# Altium PCB tramhanV2.PcbDoc
Units mm, origin at the board's own origin, x right, y up, seen from the top; angles counter-clockwise.
Board outline 75.56 x 35.05 mm, 2 copper layers (Top Layer, Bottom Layer); 76 components, 49 nets, 260 pads, 287 vias.
Unrouted connection lines stored in the file: 1.
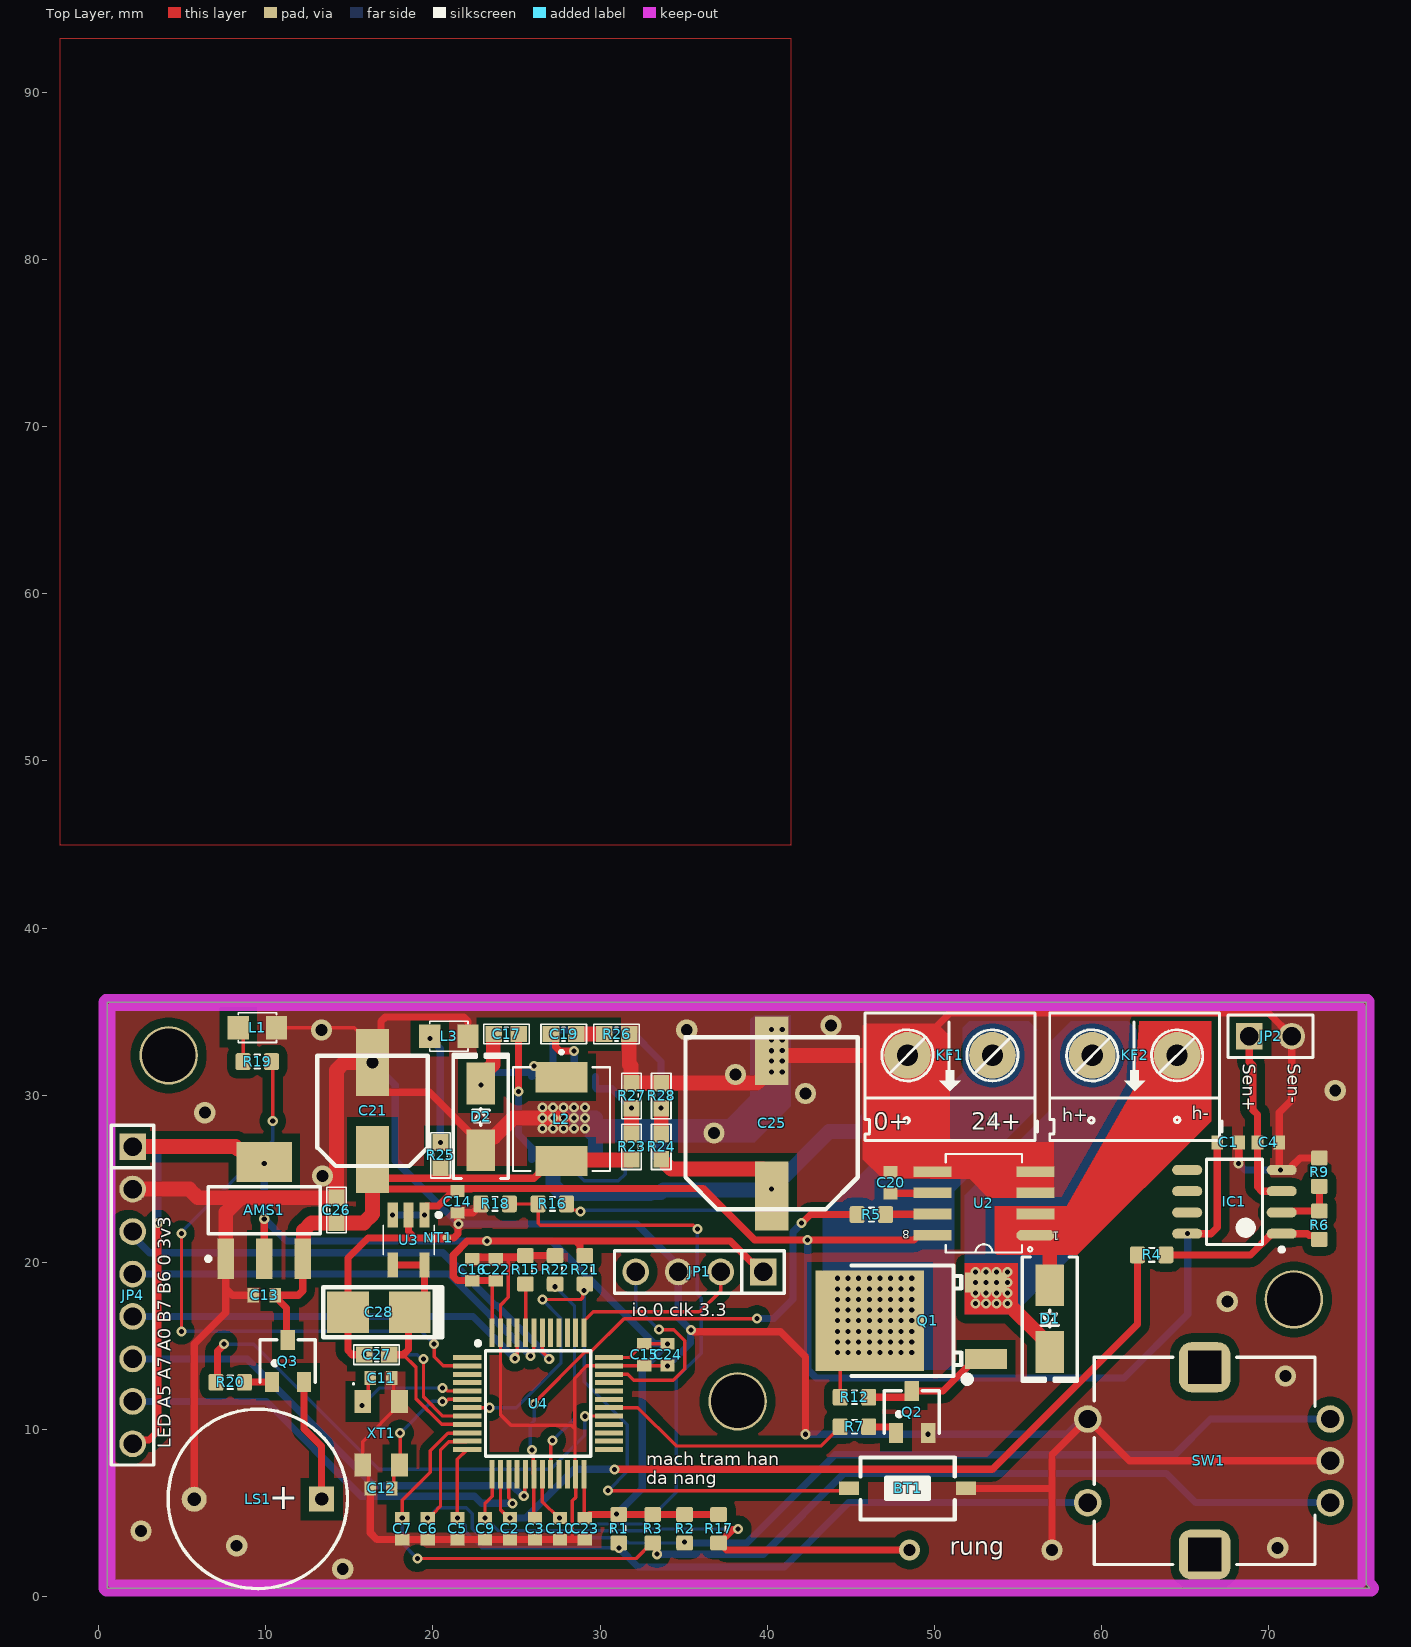
[diagram p0: Top Layer view]
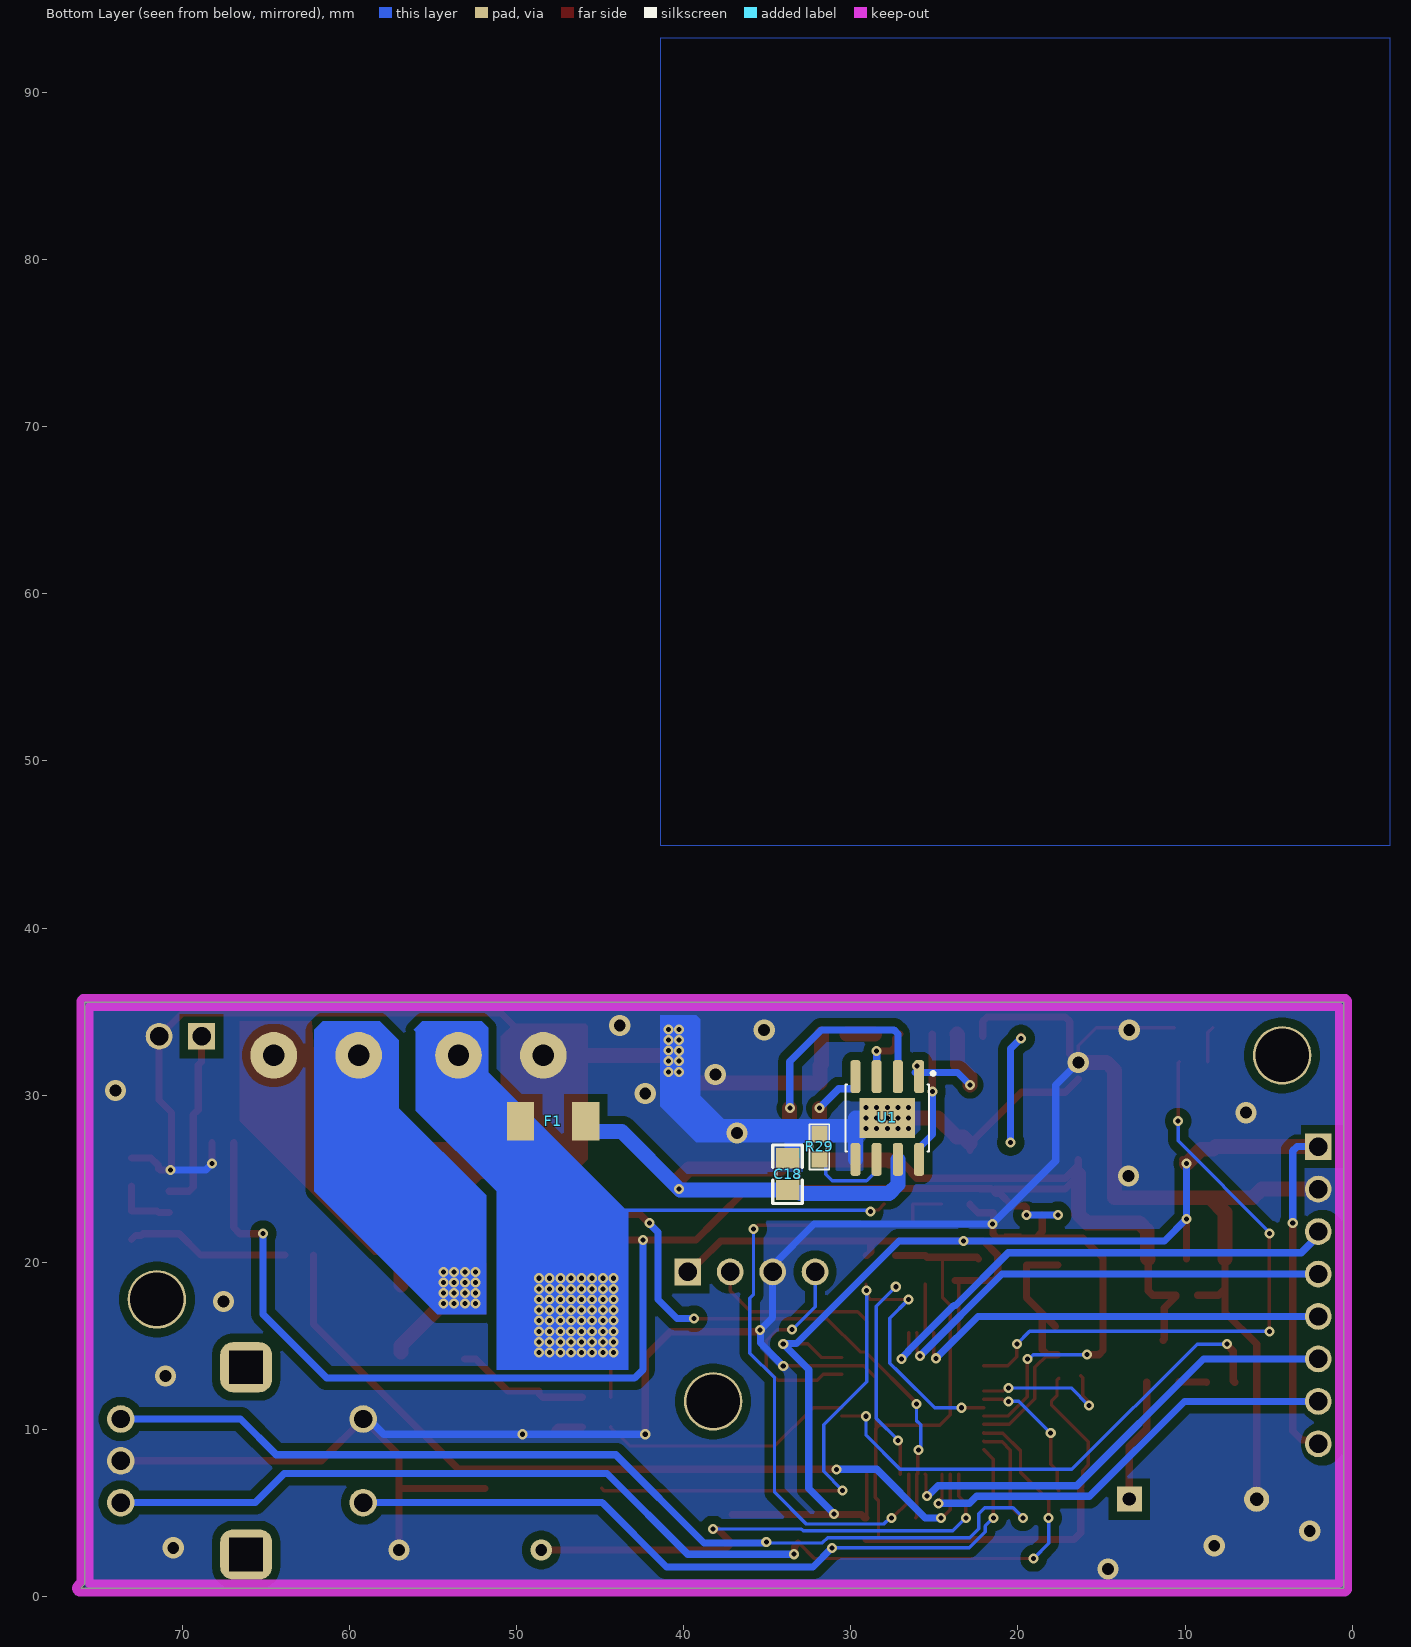
[diagram p1: Bottom Layer view, seen from below]
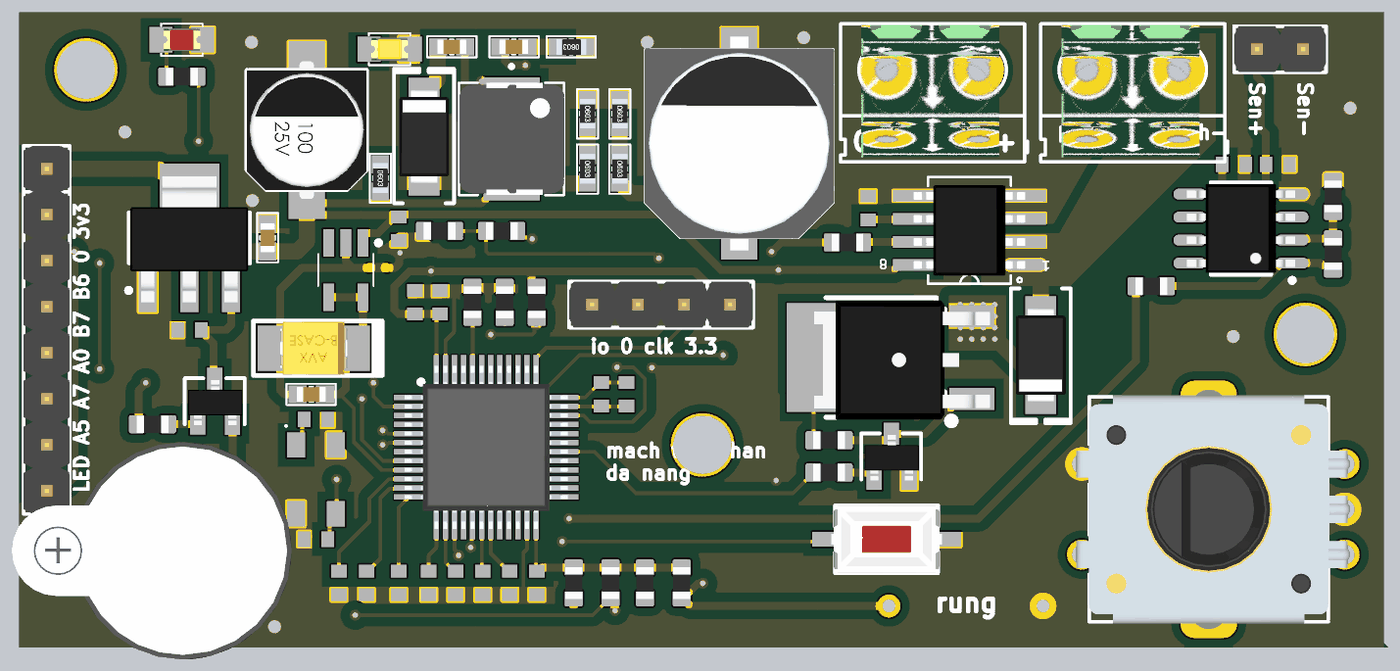
[diagram p2: 3D render of the assembled board from above, using the file's embedded part models]
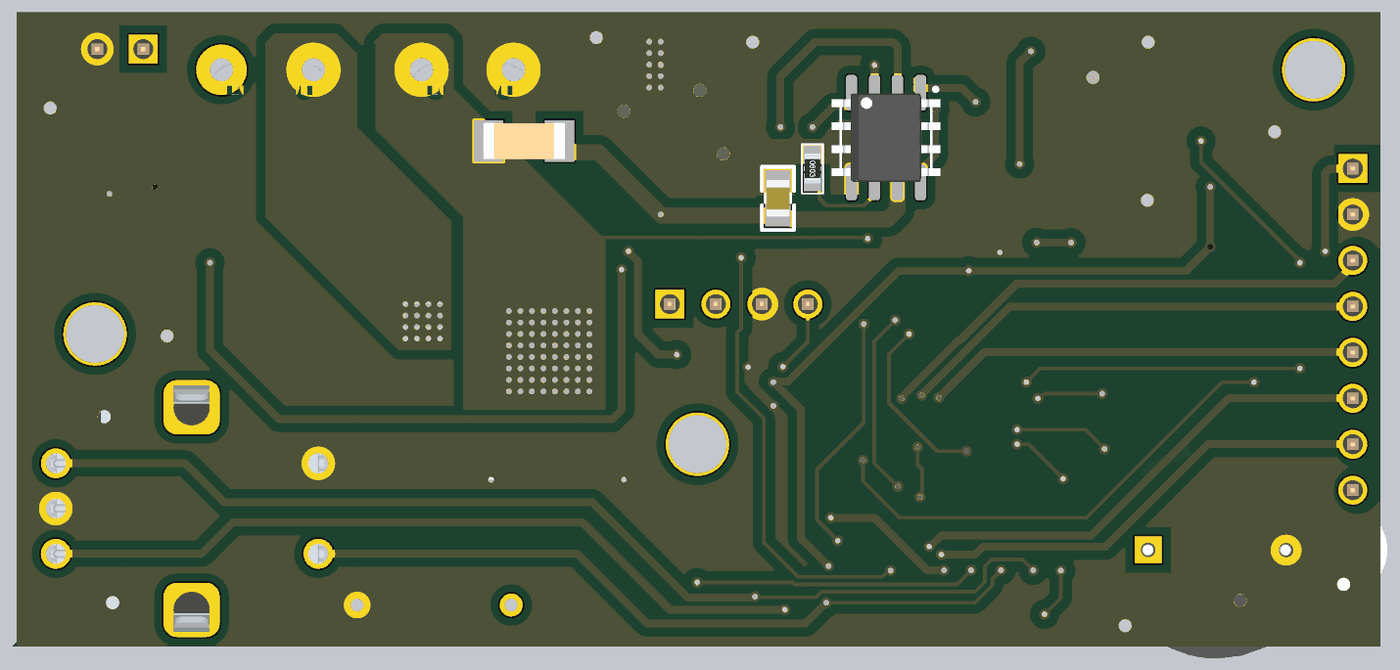
[diagram p3: 3D render of the assembled board from below, using the file's embedded part models]

## Layer stack, top to bottom
Top Solder: solder mask 0.0102, Solder Resist, Dk 3.5
Top Layer: signal copper 0.0356
Dielectric 1: dielectric 0.32, FR-4, Dk 4.8
Bottom Layer: signal copper 0.0356
Bottom Solder: solder mask 0.0102, Solder Resist, Dk 3.5

## Board outline
0.508,35.56 0.508,0.508 76.073,0.508 75.819,0.762 75.819,35.56

## Design rules (kind name [scope] priority, off if disabled: settings)
Clearance [All] p1: gap=0.508 ignorepadtopadclearanceinfootprint=FALSE
PlaneConnect [All] p1: planeconnectstyle=Direct reliefexpansion=0.508 reliefentries=4 reliefconductorwidth=0.254 reliefairgap=0.254
PolygonConnect [All] p1: connectstyle=Direct reliefconductorwidth=0.254 reliefentries=4 polygonreliefangle="90 Angle" airgapwidth=0.254
RoomDefinition Sheet1 [InComponentClass('Sheet1')] p1: confinementstyle=ConfineIn formatcopy=TRUE lockcomponents=FALSE outline 77.216,1.905 94.234,1.905 94.234,18.161 77.216,18.161
RoomDefinition Power [InComponentClass('Power')] p2: confinementstyle=ConfineIn formatcopy=TRUE lockcomponents=FALSE outline -74.803,-6.731 -24.003,-6.731 -24.003,18.669 -74.803,18.669
RoutingVias [All] p1: holewidth=0.5 width=0.8 viastyle="Through Hole" minholewidth=0.3 minwidth=0.6 maxholewidth=0.4 maxwidth=0.7
SolderMaskExpansion [All] p1: expansion=0.102 istentingtop=FALSE
Width [All] p1: maxlimit=0.889 minlimit=0.203 preferedwidth=0.432
29 further rules are at their usual default settings.

## Classes and differential pairs
component class Sheet1: AMS1 BT1 C1 C2 C3 C4 C5 C6 C7 C9 C10 C11 C12 C13 C14 C15 C16 C20 C22 C23 C24 D1 IC1 JP1 JP2 JP4 KF2 L1 LS1 Q1 Q2 Q3 R1 R2 R3 R4 R5 R6 R7 R9 R12 R15 R16 R17 R18 R19 R20 R21 R22 SW1 U2 U4 XT1
component class Power: C17 C18 C19 C21 C25 C26 C27 C28 D2 F1 KF1 L2 L3 NT1 R23 R24 R25 R26 R27 R28 R29 U1 U3

## Components (designator, comment, footprint, x,y, rotation, side; value= is the part's Value field where it differs from the comment)
AMS1 "AMS1117-3.3V" SOT223 9.906,23.114 r0 top value="AMS1117-3.3V SOT223"
BT1 "Nut Nhan 2 Chan SMD 3x6x2.5" "Nut Nhan 2 Chan SMD 3x6x2.5" 48.387,6.477 r180 top
C1 "104" CAPC1608X09L 67.564,27.178 r180 top
C2 "104" CAPC1608X09L 24.606,4.064 r270 top
C3 "103" CAPC1608X09L 26.098,4.064 r270 top
C4 "102" CAPC1608X09L 69.977,27.178 r180 top
C5 "0.1uF" CAPC1608X09L 21.463,4.064 r90 top
C6 "0.1uF" CAPC1608X09L 19.685,4.064 r90 top
C7 "0.1uF" CAPC1608X09L 18.161,4.064 r90 top
C9 "0.1uF" CAPC1608X09L 23.114,4.064 r270 top
C10 "2.2uF" CAPC1608X09L 27.591,4.064 r270 top
C11 "10pF" CAPC1608X09L 16.891,13.081 r180 top
C12 "10pF" CAPC1608X09L 16.891,6.477 r0 top
C13 "104" CAPC1608X09L 9.906,18.034 r0 top
C14 "104" CAPC1608X09L 21.463,23.622 r90 top
C15 "104" CAPC1608X09L 32.639,14.478 r90 top
C16 "104" CAPC1608X09L 22.352,19.558 r270 top
C17 "104" "tu 0603" 24.384,33.655 r0 top
C18 "474" "tu 0805" 33.782,25.273 r90 bottom
C19 "220pF" "tu 0603" 27.813,33.655 r0 top
C20 "1nF" CAPC1608X09L 47.371,24.765 r90 top
C21 "100uF" "tu nhom 6.3 (d)" 16.383,29.062 r90 top
C22 "104" CAPC1608X09L 23.749,19.558 r270 top
C23 "104" CAPC1608X09L 29.083,4.064 r90 top
C24 "104" CAPC1608X09L 34.036,14.478 r90 top
C25 "100uF" "tu nhom 10 (g)" 40.259,28.321 r90 top
C26 "106" "tu 0603" 14.224,23.114 r90 top
C27 "105" "tu 0603" 16.637,14.478 r180 top
C28 "100uF" "tu tantalum smd3528" 16.764,17.018 r180 top
D1 "SS34" "DIODE SMA" 56.896,16.637 r270 top
D2 "SS34" "DIODE SMA" 22.86,28.702 r90 top
F1 "0.5A 125V" "Cau Chi SMD1808" 47.803,28.448 r180 bottom
IC1 "LM358 SOP8" "SOP 8" 67.945,23.622 r180 top
JP1 "debug" "JP 1x4 DT" 39.751,19.431 r180 top
JP2 "JP 1x2 2.54" "JP 1x2 DT" 68.834,33.528 r0 top
JP4 "lcd_1.8 inch" "JP 1x8 DT" 2.032,26.924 r270 top
KF1 "VIN" "Con 2 KF301 5.08" 53.467,32.385 r180 top
KF2 "CON 2 KF301" "Con 2 KF301 5.08" 64.516,32.385 r180 top
L1 "LED 0805" LED-0805-Red 8.347,34.044 r0 top
L2 "100uH" "CUON CAM SMD 0530" 27.686,28.575 r270 top
L3 "LED 0805" LED-0805-Yellow 19.812,33.528 r0 top
LS1 "Coi Chip Speaker" "Coi Chip Speacker" 13.335,5.842 r180 top
NT1 "2mm" NetTie_20mil 20.32,21.463 r180 top net-tie
Q1 "TO-252" TO-252-3_L6.6-W6.1-P4.57-LS9.9-BR-CW 48.611,16.373 r0 top
Q2 "BC817" SOT-23 48.641,11.049 r0 top value=C9014
Q3 "BC817" SOT-23 11.303,14.097 r0 top value=C9014
R1 "10K" RESC1608X55N 31.115,4.064 r90 top
R2 "10K" RESC1608X55N 35.052,4.064 r90 top
R3 "10K" RESC1608X55N 33.147,4.064 r90 top
R4 "10K" RESC1608X55N 62.992,20.447 r180 top
R5 "1k" RESC1608X55N 46.228,22.86 r180 top
R6 "10K" RESC1608X55N 73.025,22.225 r270 top
R7 "4.7K" RESC1608X55N 45.212,10.16 r180 top
R9 "100R" RESC1608X55N 73.025,25.4 r270 top
R12 "10K" RESC1608X55N 45.212,11.938 r180 top
R15 "10K" RESC1608X55N 25.527,19.558 r90 top
R16 "18k" RESC1608X55N 27.143,23.495 r180 top
R17 "10k" RESC1608X55N 37.084,4.064 r270 top
R18 "1k" RESC1608X55N 23.714,23.495 r180 top
R19 "1k" RESC1608X55N 9.49,32.012 r180 top
R20 "470R" RESC1608X55N 7.874,12.827 r180 top
R21 "10K" RESC1608X55N 29.083,19.558 r90 top
R22 "10K" RESC1608X55N 27.305,19.558 r270 top
R23 "10k" "tro smd 0603" 31.877,26.924 r270 top
R24 "100k" "tro smd 0603" 33.655,26.924 r270 top
R25 "330R" "tro smd 0603" 20.447,26.416 r270 top
R26 "100k" "tro smd 0603" 30.988,33.655 r180 top
R27 "2k" "tro smd 0603" 31.877,29.972 r270 top
R28 "25k" "tro smd 0603" 33.655,29.972 r270 top
R29 "100k" "tro smd 0603" 31.877,26.924 r270 bottom
SW1 "482024764004" 482024764004 66.167,8.128 r0 top
U1 "MP1584EN" SOIC127P600X170-9N 27.813,28.637 r270 bottom
U2 "ACS712" SOIC8_50_328_25X90_SMT 52.959,23.527 r180 top
U3 "3.3V" SOT23-5 18.542,21.336 r270 top
U4 "STM32F103C8T6" LQFP-48_19.6_393_58X11_SMD 26.289,11.557 r0 top locked
XT1 "8 MHz" DFN220P320X110-4N 16.891,9.779 r270 top

## Footprints (in the part's own frame and the unit in brackets; to place one, negate y for a bottom-side part, rotate by r counter-clockwise, add the part's x,y. Pads: shape width x height; smd on the part's side, far side on the other; paste and mask are expansions set on the pad)
482024764004 [mm] "Mechanical Incremental Encoder Switch Plastic Shaft without bushing"
  round 1.65 hole 1.1: 1(-7,-2.5) 2(-7,2.5) A(7.5,-2.5) B(7.5,2.5) C(7.5,0)
  rrect50% 3.1x3 hole 2 square: S1(0,5.6) S2(0,-5.6)
  silkscreen extent -6.6,-6.2 6.6,6.2, body extent -7.32,-6.81 7.8,6.81, height 20.1
CAPC1608X09L [mm]
  rect 0.7x0.85 smd: 1(-0.65,0) 2(0.65,0)
  body extent -0.85,-0.45 0.85,0.45, height 0.9
"Cau Chi SMD1808" [mil]
  rect 64x90 smd: 1(-77,0) 2(77,0)
  body extent -91,-39 91,39, height 39
"Coi Chip Speacker" [mm]
  rect 1.5x1.5 hole 0.8: 1(0,0)
  round 1.5 hole 0.8: 2(7.62,0.013)
  silkscreen extent -1.55,-5.38 9.18,5.36, body extent -2.22,-6 13.24,6, height 4.5
"Con 2 KF301 5.08" [mil]
  round 110 hole 50: 1(0,0) 2(200,0)
  silkscreen extent -106,-100 300,200, body extent -45,-97 255,190, height 335
"CUON CAM SMD 0530" [mm] "CUON CAM SMD 0530"
  rect 1.8x3.1 smd: 1(-2.5,0) 2(2.5,0)
  silkscreen extent -4.1,-2.9 3.1,2.9, body extent -3.1,-2.88 3.1,2.92, height 3
DFN220P320X110-4N [mm]
  rect 1.4x1 smd: 1(-1.9,-1.1) 3(1.9,1.1) G(-1.9,1.1) G(1.9,-1.1)
  silkscreen extent -3,-1.7 -2.9,-1.6, body extent -2.55,-1.65 2.55,1.65, height 1.1
"DIODE SMA" [mm] "SMA"
  rect 2.5x1.7 smd: 1(-2,0) 2(2,0)
  silkscreen extent -3.68,-1.65 3.75,1.65, body extent -2.6,-1.37 2.6,1.37, height 2.4
"JP 1x2 DT" [mm] "2 pins, 1 row, straight, gold plating"
  rect 1.6x1.6 hole 1.1: 1(0,0)
  round 1.6 hole 1.1: 2(2.54,0)
  silkscreen extent -1.27,-1.27 3.81,1.27, body extent -1.27,-1.27 3.81,1.27, height 8.54
"JP 1x4 DT" [mm] "4 pins, 1 row, straight, gold plating"
  rect 1.6x1.6 hole 1.1: 1(0,0)
  round 1.6 hole 1.1: 2(2.54,0) 3(5.08,0) 4(7.62,0)
  silkscreen extent -1.27,-1.27 8.89,1.27, body extent -1.27,-1.27 8.89,1.27, height 8.54
"JP 1x8 DT" [mm] "8 pins, 1 row, straight, gold plating"
  rect 1.6x1.6 hole 1.1: 1(0,0)
  round 1.6 hole 1.1: 2(2.54,0) 3(5.08,0) 4(7.62,0) 5(10.16,0) 6(12.7,0) 7(15.24,0) 8(17.78,0)
  silkscreen extent -1.27,-1.27 19.05,1.27, body extent -1.27,-1.27 19.05,1.27, height 8.54
LED-0805-Red [mil]
  rect 50x55 smd: 1(0,0) 2(90,0)
  silkscreen extent 0,-35 90,35, body extent 5,-25 85,25, height 43
LED-0805-Yellow [mil]
  rect 50x55 smd: 1(0,0) 2(90,0)
  silkscreen extent 0,-35 90,35, body extent 5,-25 85,25, height 43
LQFP-48_19.6_393_58X11_SMD [mm] "48LQFP"
  rect 1.7x0.3 smd mask+0.076: 1(-4.238,2.75) 2(-4.238,2.25) 3(-4.238,1.75) 4(-4.238,1.25) 5(-4.238,0.75) 6(-4.238,0.25) 7(-4.238,-0.25) 8(-4.238,-0.75) 9(-4.238,-1.25) 10(-4.238,-1.75) 11(-4.238,-2.25) 12(-4.238,-2.75) 25(4.238,-2.75) 26(4.238,-2.25) 27(4.238,-1.75) 28(4.238,-1.25) 29(4.238,-0.75) 30(4.238,-0.25) 31(4.238,0.25) 32(4.238,0.75) 33(4.238,1.25) 34(4.238,1.75) 35(4.238,2.25) 36(4.238,2.75)
  rect 0.3x1.7 smd mask+0.076: 13(-2.75,-4.238) 14(-2.25,-4.238) 15(-1.75,-4.238) 16(-1.25,-4.238) 17(-0.75,-4.238) 18(-0.25,-4.238) 19(0.25,-4.238) 20(0.75,-4.238) 21(1.25,-4.238) 22(1.75,-4.238) 23(2.25,-4.238) 24(2.75,-4.238) 37(2.75,4.238) 38(2.25,4.238) 39(1.75,4.238) 40(1.25,4.238) 41(0.75,4.238) 42(0.25,4.238) 43(-0.25,4.238) 44(-0.75,4.238) 45(-1.25,4.238) 46(-1.75,4.238) 47(-2.25,4.238) 48(-2.75,4.238)
  silkscreen extent -3.72,-3.15 3.15,3.72, body extent -4.5,-4.5 4.5,4.5, height 1.7
NetTie_20mil [mil]
  round 20 smd paste-78.74 mask+4: 1(-19.68,0) 2(19.68,0)
  Top Layer region: -20,10 20,10 20,-10 -20,-10
"Nut Nhan 2 Chan SMD 3x6x2.5" [mm] "Switch SMD type"
  rect 1.2x0.8 smd: 1(-3.5,0) 2(3.5,0)
  silkscreen extent -2.82,-1.85 2.82,1.85, body extent -3.05,-1.85 3.05,1.85, height 2.5
RESC1608X55N [mm]
  round 0.254 on Mech15: 0(0,0)
  rrect25% 0.9x1 smd: 1(-0.85,0) 2(0.85,0)
  Top Layer pour cut-out: -0.6,0.5 -0.4,0.7 0.4,0.7 0.6,0.5 0.6,-0.5 0.4,-0.7 -0.4,-0.7 -0.6,-0.5
  silkscreen extent -0.15,-0.41 0.15,0.41, body extent -0.87,-0.47 0.88,0.48, height 0.54
SOIC8_50_328_25X90_SMT [mil] "SOIC"
  oval 90x25 smd mask+3: 1(-121.32,75)
  rect 90x25 smd mask+3: 2(-121.32,25) 3(-121.32,-25) 4(-121.32,-75) 5(121.32,-75) 6(121.32,-25) 7(121.32,25) 8(121.32,75)
  silkscreen extent -114,-116 90,116, body extent -121,-98 121,98, height 79
SOIC127P600X170-9N [mm]
  rrect54% 1.97x0.6 smd: 1(-2.475,1.905) 2(-2.475,0.635) 3(-2.475,-0.635) 4(-2.475,-1.905) 5(2.475,-1.905) 6(2.475,-0.635) 7(2.475,0.635) 8(2.475,1.905)
  rect 2.41x3.3 smd paste-3: 9(0,0)
  silkscreen extent -2.77,-2.5 2,2.84, body extent -2.45,-3 2.45,3, height 1.7
"SOP 8" [mm] "SOIC, 8-Leads, Body 4.9x3.9mm, Pitch 1.27mm, IPC High Density"
  oval 1.8x0.6 smd: 1(-2.825,1.905) 2(-2.825,0.635) 3(-2.825,-0.635) 4(-2.825,-1.905) 5(2.825,-1.905) 6(2.825,-0.635) 7(2.825,0.635) 8(2.825,1.905)
  silkscreen extent -2.95,-2.55 1.68,2.98, body extent -2.99,-2.45 3,2.45, height 1.6
SOT23-5 [mm]
  rect 1.5x0.6 smd: 1(-1.5,0.95) 2(-1.5,0) 3(-1.5,-0.95) 4(1.5,-0.95) 5(1.5,0.95)
  silkscreen extent -1.62,-1.53 0.88,1.93, body extent -1.75,-1.52 1.75,1.53, height 1.45
SOT223 [mm]
  rect 1x2.4 smd: 1(-2.3,-2.9) 2(0,-2.9) 3(2.3,-2.9)
  rect 3.3x2.4 smd: 4(0,2.9)
  silkscreen extent -3.47,-3.02 3.35,1.4, body extent -3.25,-3.56 3.25,3.4, height 1.68
SOT-23 [mm] "SOT 23 _ 1-3-2"
  rect 0.85x1.2 smd: 1(-0.94,-1.245) 2(0.985,-1.25) 3(0.005,1.25)
  silkscreen extent -1.65,-1.27 1.65,1.27, body extent -1.47,-1.33 1.53,1.17, height 1.06
TO-252-3_L6.6-W6.1-P4.57-LS9.9-BR-CW [mm]
  rect 2.5x1.2 smd: 1(4.475,-2.149) 3(4.475,2.423)
  rect 6.5x6 smd: 2(-2.475,0.137)
  silkscreen extent -3.57,-3.56 3.55,3.44, body extent -4.23,-3.29 5.47,3.29, height 2.32
"tro smd 0603" [mm] "Chip Capacitor, 2-Leads, Body 1,60x0,80mm, IPC Medium Density"
  rect 1x0.95 smd mask+0.076: 1(-0.75,0) 2(0.75,0)
  silkscreen extent -1.35,-0.58 1.37,0.58, body extent -0.82,-0.42 0.82,0.43, height 0.44
"tu 0603" [mm] "Chip Capacitor, 2-Leads, Body 1,60x0,80mm, IPC Medium Density"
  rect 1x0.95 smd mask+0.076: 1(-0.75,0) 2(0.75,0)
  silkscreen extent -1.35,-0.58 1.37,0.58, body extent -0.8,-0.4 0.8,0.4, height 0.9
"tu 0805" [mm] "Compoment SMD 80x50mil"
  rect 1.2x1.4 smd: 1(-0.946,-0.003) 2(0.954,-0.003)
  silkscreen extent -1.75,-0.89 1.75,0.89, body extent -1.01,-0.64 1.01,0.63, height 0.61
"tu nhom 6.3 (d)" [mm]
  rect 4x2 smd: 1(-2.9,0) 2(2.9,0)
  silkscreen extent -3.3,-3.3 3.3,3.3, body extent -3.8,-3.3 3.8,3.3, height 8
"tu nhom 10 (g)" [mm]
  rect 4.1x2 smd: 1(-4.35,0) 2(4.35,0)
  silkscreen extent -5.15,-5.15 5.15,5.15, body extent -5.9,-5.25 5.9,5.25, height 10.5
"tu tantalum smd3528" [mm]
  rect 2.5x2.5 smd: 1(-1.85,0) 2(1.85,0)
  silkscreen extent -3.78,-1.5 3.33,1.5, body extent -1.85,-1.46 1.85,1.47, height 2.03

## Part data
AMS1: library part "AMS1117 SMD", "Dán", Chung_Loai=Dán, Don_Vi=Con, Ma_Hang=MH000596
C1 C2 C3 C4 C10 C11 C12 C13 C14 C15 C16 C20 C22 C23 C24: library part GRM188R71H104KA93D, "CAP CER 0.1UF 50V X7R 0603", Capacitance=0.1uF, Manufacturer="Murata Electronics North America", Operating Temperature="-55°C ~ 125°C", Package / Case="0603 (1608 Metric)", Ratings=-, Supplier Part Number 1=490-1519-2-ND, Temperature Coefficient=X7R, Tolerance=±10%, Voltage - Rated=50V, Applications="General Purpose", Category=Capacitors, ComponentLink1Description=http://www.murata.com/~/media/webrenewal/support/library/catalog/products/capacitor/mlcc/c02e.ashx?la=en-us, ComponentLink1URL=http://www.murata.com/~/media/webrenewal/support/library/catalog/products/capacitor/mlcc/c02e.ashx?la=en-us, Features=-, Height - Seated (Max)=-, Lead Spacing=-, Lead Style=-, Manufacturer Part Number=GRM188R71H104KA93D, Mounting Type="Surface Mount, MLCC", Packaging="Tape & Reel (TR)", Part Status=Active, Pricing 1="4000=0.01822, 8000=0.01663, 12000=0.01584 (USD)", Pricing 2="1=0.12, 10=0.084, 100=0.0396, 500=0.02778, 1000=0.023 (USD)", RoHS="RoHS Compliant", Size / Dimension="0.063\" L x 0.032\" W (1.60mm x 0.80mm)", Stock=19812000, Supplier 1=Digi-Key, Supplier 2=Digi-Key, Supplier Part Number 2=490-1519-1-ND, Thickness (Max)="0.035\" (0.90mm)"
C5 C6 C7 C9: library part GRM188R71H104KA93D, "CAP CER 0.1UF 50V X7R 0603", Manufacturer="Murata Electronics North America", Operating Temperature="-55°C ~ 125°C", Package / Case="0603 (1608 Metric)", Ratings=-, Supplier Part Number 1=490-1519-2-ND, Temperature Coefficient=X7R, Tolerance=±10%, Voltage - Rated=50V, Applications="General Purpose", Capacitance=0.1uF, Category=Capacitors, ComponentLink1Description=http://www.murata.com/~/media/webrenewal/support/library/catalog/products/capacitor/mlcc/c02e.ashx?la=en-us, ComponentLink1URL=http://www.murata.com/~/media/webrenewal/support/library/catalog/products/capacitor/mlcc/c02e.ashx?la=en-us, Features=-, Height - Seated (Max)=-, Lead Spacing=-, Lead Style=-, Manufacturer Part Number=GRM188R71H104KA93D, Mounting Type="Surface Mount, MLCC", Packaging="Tape & Reel (TR)", Part Status=Active, Pricing 1="4000=0.01822, 8000=0.01663, 12000=0.01584 (USD)", Pricing 2="1=0.12, 10=0.084, 100=0.0396, 500=0.02778, 1000=0.023 (USD)", RoHS="RoHS Compliant", Size / Dimension="0.063\" L x 0.032\" W (1.60mm x 0.80mm)", Stock=19812000, Supplier 1=Digi-Key, Supplier 2=Digi-Key, Supplier Part Number 2=490-1519-1-ND, Thickness (Max)="0.035\" (0.90mm)"
C17: library part "Tu 0603 104 50V 10%", "Dán", Chung_Loai=Dán, Don_Vi=Con, Ma_Hang=MH004568, So_Chan=2, Ten_Linh_Kien="Tụ 0603 104-100nF 10% 50V"
C18: library part "Tu 0805 474 50V 10%", "Dán", Chung_Loai=Dán, Don_Vi=Con, Ma_Hang=MH006116, So_Chan=2, Ten_Linh_Kien="Tụ 0805 474-470nF 50V 10%"
C19: library part "Tu 0603 22pF 50V 10%", "Dán", Chung_Loai=Dán, Don_Vi=Con, Ma_Hang=MH004570, So_Chan=2, Ten_Linh_Kien="Tụ 0603 22pF 50V 10%"
C21: library part "Tu Nhom 100uF 16V", "Dán", Chung_Loai=Dán, Don_Vi=Con, Ma_Hang=MH002219, So_Chan=2, Ten_Linh_Kien="Tụ Nhôm 100uF 16V 6.3x5.4MM"
C25: library part "Tu Nhom 100uF 35V", "Dán", Chung_Loai=Dán, Don_Vi=Con, Ma_Hang=MH004019, So_Chan=2, Ten_Linh_Kien="Tụ Nhôm 100uF 35V"
C26 C27: library part "Tu 0603 106 16V 20%", "Dán", Chung_Loai=Dán, Don_Vi=Con, Ma_Hang=MH004848, So_Chan=2, Ten_Linh_Kien="Tụ 0603-10uF 20% 16V"
C28: library part "Tu tantalum 100uF 6.3V SMD3528", "Dán", Chung_Loai=Dán, Don_Vi=Con, Ma_Hang=MH007595, So_Chan=2, Ten_Linh_Kien="Tụ tantalum 107J-100uF 6.3V SMD3528"
D1 D2: library part "Diode SS34 ( 1N5822 )", "Dán", Chung_Loai=Dán, Don_Vi=Con, Ma_Hang=MH002104, Ten_Linh_Kien="Diode SS34 3A 40V SMA ( 1N5822 SS34A)"
F1: library part "Cau chi 0.5A 125V SMD1808", "Cau chi 0.5A 125V SMD1808", Ma_Hang=MH009241, Ten="Cầu Chì 0.5A 125V SMD1808 0451.500MRL"
IC1: "Dán", Chung_Loai=Dán, Don_Vi=Con, Ma_Hang=MH000609, Ten_Linh_Kien="LM358 SOP8"
JP1: library part "JP 1x4 2.54 Duc Thang", "Cắm", Chung_Loai=Cắm, Don_Vi=Con, Ma_Hang=MH000903, Ten_Linh_Kien="Jump Đơn Đực 2.54MM 1x40P Thẳng 11MM"
JP2: library part "JP 1x2 2.54 Duc Thang", "Cắm", Chung_Loai=Cắm, Don_Vi=Con, Ma_Hang=MH000903, Ten_Linh_Kien="Jump Đơn Đực 2.54MM 1x40P Thẳng 11MM"
JP4: library part "JP 1x8 2.54 Duc Thang", "Cắm", Chung_Loai=Cắm, Don_Vi=Con, Ma_Hang=MH000903, Ten_Linh_Kien="Jump Đơn Đực 2.54MM 1x40P Thẳng 11MM"
KF1: library part "CON 2 KF301", "Cắm", Chung_Loai=Cắm, Don_Vi=Con, Ma_Hang=MH000987, Ten_Linh_Kien="CON 2 KF301-2P 5.08MM Xanh Dương"
KF2: "Cắm", Chung_Loai=Cắm, Don_Vi=Con, Ma_Hang=MH000987, Ten_Linh_Kien="CON 2 KF301-2P 5.08MM Xanh Dương"
L1: library part "LED 0805 Do", "Dán", Chung_Loai=Dán, Don_Vi=Con, Ma_Hang=MH000897, Ten_Linh_Kien="LED 0805 Màu Đỏ (Red)"
L2: library part "Cuon Cam SMD 0530", "SMD 0530", Package=None, Availability=Unavailable, MP=FDV0530-H-1R5M=P3, Price=None
L3: library part "LED 0805 Vang", "Dán", Chung_Loai=Dán, Don_Vi=Con, Ma_Hang=MH002329, Ten_Linh_Kien="LED 0805 Màu Vàng ( Yellow)"
LS1: "Còi chip"
NT1: library part NetTie_2mm
Q1: library part "FET AO D409", "P-Channel Power MOSFET", ComponentLink1Description="Manufacturer Link", ComponentLink1URL=http://www.irf.com/, ComponentLink2Description=Datasheet, ComponentLink2URL=http://www.irf.com/product-info/datasheets/data/irf9540.pdf, DatasheetVersion=PD-9.421C, LatestRevisionDate=17-Jul-2002, LatestRevisionNote="Re-released for DXP Platform.", Note="Pin 2 is electrically connected to pin 4.", PackageDescription="TO, Thru-Hole, Vertical, Heatsink Mounted; 3 In-Line Leads; Pitch 2.54 mm", PackageReference=TO-220AB, PackageVersion=Feb-1997, Published=8-Jun-2000, Publisher="Altium Limited"
Q2 Q3: library part "Trans BC817", "SOT-23 - C8658"
R1 R2 R3 R4 R6 R9 R15 R19 R20 R21 R22: library part RC0603FR-0710KL, "RES SMD 10K OHM 1% 1/10W 0603", Manufacturer=Yageo, Operating Temperature="-55°C ~ 155°C", Package / Case="0603 (1608 Metric)", Power (Watts)="0.1W, 1/10W", Resistance (Ohms)=10k, Supplier Device Package=0603, Supplier Part Number 1=311-10.0KHRCT-ND, Temperature Coefficient=±100ppm/°C, Tolerance=±1%, Category=Resistors, ComponentLink1Description=http://www.yageo.com/documents/recent/PYu-RC_Group_51_RoHS_L_04.pdf, ComponentLink1URL=http://www.yageo.com/documents/recent/PYu-RC_Group_51_RoHS_L_04.pdf, Composition="Thick Film", Features="Moisture Resistant", Height="0.022\" (0.55mm)", Manufacturer Part Number=RC0603FR-0710KL, Number of Terminations=2, Packaging="Cut Tape (CT)", Pricing 1="1=0.1, 10=0.014, 25=0.01, 100=0.0057, 250=0.00436, 500=0.00348, 1000=0.00257, 2500=0.00223 (USD)", RoHS="RoHS Compliant", Size / Dimension="0.063\" L x 0.031\" W (1.60mm x 0.80mm)", Stock 1=13504930, Supplier 1=Digi-Key
R5 R16 R17 R18: library part RC0603FR-072R2L, "RES SMD 2.2 OHM 1% 1/10W 0603", Manufacturer=Yageo, Operating Temperature="-55°C ~ 155°C", Package / Case="0603 (1608 Metric)", Power (Watts)="0.1W, 1/10W", Resistance (Ohms)=2.2, Supplier Device Package=0603, Supplier Part Number 1=311-2.2HRCT-ND, Temperature Coefficient=±200ppm/°C, Tolerance=±1%, Category=Resistors, ComponentLink1Description=http://www.yageo.com/documents/recent/PYu-RC_Group_51_RoHS_L_04.pdf, ComponentLink1URL=http://www.yageo.com/documents/recent/PYu-RC_Group_51_RoHS_L_04.pdf, Composition="Thick Film", Features="Moisture Resistant", Height="0.022\" (0.55mm)", Manufacturer Part Number=RC0603FR-072R2L, Number of Terminations=2, Packaging="Cut Tape (CT)", Pricing 1="1=0.1, 10=0.02, 25=0.0144, 100=0.0082, 250=0.00624, 500=0.00498, 1000=0.00367, 2500=0.00319 (USD)", RoHS="RoHS Compliant", Size / Dimension="0.063\" L x 0.031\" W (1.60mm x 0.80mm)", Stock 1=16531, Supplier 1=Digi-Key
R7: library part RC0603FR-0747KL, "RES SMD 47K OHM 1% 1/10W 0603", Manufacturer=Yageo, Operating Temperature="-55°C ~ 155°C", Package / Case="0603 (1608 Metric)", Power (Watts)="0.1W, 1/10W", Resistance (Ohms)=47k, Supplier Device Package=0603, Supplier Part Number 1=311-47.0KHRCT-ND, Temperature Coefficient=±100ppm/°C, Tolerance=±1%, Category=Resistors, ComponentLink1Description=http://www.yageo.com/documents/recent/PYu-RC_Group_51_RoHS_L_04.pdf, ComponentLink1URL=http://www.yageo.com/documents/recent/PYu-RC_Group_51_RoHS_L_04.pdf, Composition="Thick Film", Features="Moisture Resistant", Height="0.022\" (0.55mm)", Manufacturer Part Number=RC0603FR-0747KL, Number of Terminations=2, Packaging="Cut Tape (CT)", Pricing 1="1=0.1, 10=0.014, 25=0.01, 100=0.0057, 250=0.00436, 500=0.00348, 1000=0.00257, 2500=0.00223 (USD)", RoHS="RoHS Compliant", Size / Dimension="0.063\" L x 0.031\" W (1.60mm x 0.80mm)", Stock 1=930868, Supplier 1=Digi-Key
R12: library part RC0603FR-0722RL, "RES SMD 22 OHM 1% 1/10W 0603", Manufacturer=Yageo, Operating Temperature="-55°C ~ 155°C", Package / Case="0603 (1608 Metric)", Power (Watts)="0.1W, 1/10W", Resistance (Ohms)=22, Supplier Device Package=0603, Supplier Part Number 1=311-22.0HRCT-ND, Temperature Coefficient=±100ppm/°C, Tolerance=±1%, Category=Resistors, ComponentLink1Description=http://www.yageo.com/documents/recent/PYu-RC_Group_51_RoHS_L_04.pdf, ComponentLink1URL=http://www.yageo.com/documents/recent/PYu-RC_Group_51_RoHS_L_04.pdf, Composition="Thick Film", Features="Moisture Resistant", Height="0.022\" (0.55mm)", Manufacturer Part Number=RC0603FR-0722RL, Number of Terminations=2, Packaging="Cut Tape (CT)", Pricing 1="1=0.1, 10=0.014, 25=0.01, 100=0.0057, 250=0.00436, 500=0.00348, 1000=0.00257, 2500=0.00223 (USD)", RoHS="RoHS Compliant", Size / Dimension="0.063\" L x 0.031\" W (1.60mm x 0.80mm)", Stock 1=575303, Supplier 1=Digi-Key
R23 R27: library part "Tro 0603 5% 510R", "Dán", Chung_Loai=Dán, Don_Vi=Con, Ma_Hang=MH007667, So_Chan=2, Ten_Linh_Kien="Trở 0603 5% 510R"
R24 R26 R28 R29: library part "Tro 0603 5% 100k", "Dán", Chung_Loai=Dán, Don_Vi=Con, Ma_Hang=MH006314, So_Chan=2, Ten_Linh_Kien="Trở 0603 5% 100k"
R25: library part "Tro 0603 5% 330R", "Dán", Chung_Loai=Dán, Don_Vi=Con, Ma_Hang=MH006910, So_Chan=2, Ten_Linh_Kien="Trở 0603 5% 330R"
SW1: "WS-ENTV Mechanical Incremental Encoder Switch, Plastic Shaft without bushing, 24Pulse/360°, 24positi", Insulation Resistance=100MΩ, Manufacturer="Wurth Elektronik", Operating Temperature Max=85°C, Operating Temperature Min=-40°C, Rated Current=10mA, Category="Encoder Switches", ComponentLink1Description="Website Link", ComponentLink1URL=https://www.we-online.com/redexpert/article/482024764004?ad, ComponentLink2Description="Datasheet Link", ComponentLink2URL=https://www.we-online.com/redexpert/spec/482024764004?ad, Detent=24positions, Electrical Life Encoder=30000Cycles, Electrical Life Switch=20000Cycles, Height=20mm, Length=13.2mm, Manufacturer Part Number=482024764004, Match Code=WS-ENTV, Mount="Through Hole", Operation Force=300g, Packaging=Tray, Resolution=24Pulse/360°, Width=12.4mm
U1: "Buck Switching Regulator IC Positive Adjustable 0.8V 1 Output 3A 8-SOIC (0.154, 3.90mm Width) Exposed Pad", Package="SOIC-8 Monolithic Power", Availability="In Stock", Check_prices=https://www.snapeda.com/parts/MP1584EN/Monolithic+Power+Systems+Inc./view-part/?ref=eda, MF="Monolithic Power", MP=MP1584EN, Price=None, Purchase-URL=https://pricing.snapeda.com/search/part/MP1584EN/?ref=eda, SnapEDA_Link=https://www.snapeda.com/parts/MP1584EN/Monolithic+Power+Systems+Inc./view-part/?ref=snap
U2: "ACS712 Hall Effect-Based Linear Current Sensor"
U3: library part LP5907MFX-3.3/NOPB, "IC REG LDO 3.3V 0.25A SOT23-5", Current - Limit (Min)=-, Current - Output=250mA, Manufacturer="Texas Instruments", Operating Temperature="-40°C ~ 125°C", Package / Case="SC-74A, SOT-753", Supplier Device Package=SOT-23, Supplier Part Number 1=296-38557-1-ND, Voltage - Input="Up to 5.5V", Category="Integrated Circuits (ICs)", ComponentLink1Description=http://www.ti.com/lit/ds/symlink/lp5907.pdf, ComponentLink1URL=http://www.ti.com/lit/ds/symlink/lp5907.pdf, Mounting Type="Surface Mount", Packaging="Cut Tape (CT)", Part Status=Active, Pricing 1="1=0.57, 10=0.487, 100=0.3634, 500=0.28552, 1000=0.22063 (USD)", Regulator Topology="Positive Fixed", RoHS="RoHS Compliant", Stock 1=39845, Supplier 1=Digi-Key, Voltage - Dropout (Typical)=-, Voltage - Output=3.3V
U4: library part IC_STM32F103C8T6, "ARM® Cortex®-M3 STM32F1 Microcontroller IC 32-Bit 72MHz 64KB (64K x 8) FLASH 48-LQFP (7x7)", Alternate Part Number-1=NA, Case/Package=LQFP48, Manufacturer=STMicroelectronics, Manufacturer Part Number=STM32F103C8T6, Supplier Part Number-1=STM32F103C8T6, Supplier-1=LCSC
XT1: library part ABM3B-8.000MHZ-10-1-U-T, "Crystal 8MHz ±10ppm 10pF 200 Ohm -10°C ~ 60°C Surface Mount 4-SMD, No Lead (DFN, LCC)", Frequency Stability=±10ppm, Load Capacitance=10pF, Manufacturer="Abracon LLC", Operating Mode=Fundamental, Operating Temperature="-10°C ~ 60°C", Package / Case="4-SMD, No Lead", Ratings=-, Supplier Part Number 1=535-9721-1-ND, Category="Crystals, Oscillators, Resonators", ComponentLink1Description=http://www.abracon.com/Resonators/abm3b.pdf, ComponentLink1URL=http://www.abracon.com/Resonators/abm3b.pdf, Frequency Tolerance=±10ppm, Height - Seated (Max)="0.043\" (1.10mm)", Manufacturer Part Number=ABM3B-8.000MHZ-10-1-U-T, Mounting Type="Surface Mount", Packaging="Cut Tape (CT)", Part Status=Active, Pricing 1="1=0.69, 10=0.578, 50=0.5198, 100=0.462, 500=0.4389 (USD)", Pricing 2="1000=0.336, 3000=0.315, 5000=0.3045, 10000=0.294 (USD)", RoHS="RoHS Compliant", Size / Dimension="0.197\" L x 0.126\" W (5.00mm x 3.20mm)", Stock=35437, Supplier 1=Digi-Key, Supplier 2=Digi-Key, Supplier Part Number 2=535-9721-2-ND, Type="MHz Crystal"
BT1: Ma_Hang=MH001036, Ten="Nút Nhấn 2 Chân 3x6x2.5MM SMD"

## Free pads (board coordinates)
  round 3.5 hole 3.2: 8(4.191,32.385) 9(38.227,11.684) 10(71.501,17.78)

## Via types
v1: diameter 0.6, hole 0.3, Top Layer to Bottom Layer, tented both sides, 269 vias
v2: diameter 1.27, hole 0.711, Top Layer to Bottom Layer, tented both sides, 16 vias
v3: diameter 1.27, hole 0.711, Top Layer to Bottom Layer, 2 vias

## Nets (pads, with @x,y where several pads share a name; then routed paths per layer and width w, separated by ;. In a path a pad name is that pad's centre, name@x,y a point inside that pad or via, vN(x,y) a via of type N, cw(c..) or ccw(c..) an arc to the next point about the centre after c; other vN are vias at no path point)
5v: AMS1.3 C1.2 C13.2 C14.2 C21.1 C26.1 IC1.8 L2.2 Q3.3 R23.2 R25.2 U2.8 U3.1 U3.3 | length 116.6
  Top Layer w0.432: Q3.3 11.243,15.412 11.243,17.272 10.556,17.959 C13.2 11.938,18.034 12.206,18.302 AMS1.3 ; C21.1 C21.1@16.383,25.817 ; v1(19.492,22.836) 19.492,23.286 19.576,23.37 20.322,23.37 21.09,24.138 21.329,24.138 C14.2 21.351,24.384 17.161,24.384 16.383,25.162 16.383,25.295 C21.1@16.383,25.817 ; C14.2@21.597,24.406 22.298,24.406 22.306,24.414 36.173,24.414 38.1,22.488 39.251,21.336 48.766,21.336 49.052,21.622 U2.8 ; L2.2 27.036,26.075 26.352,25.391 26.352,25.335 26.05,25.033 17.167,25.033 C21.1@16.383,25.817 ; IC1.8 v1(65.151,21.717) 66.548,21.717 66.914,22.083 C1.2
  Top Layer w0.889: AMS1.3 12.262,20.27 12.262,21.901 12.725,22.364 C26.1 15.862,22.364 16.383,22.885 C21.1@16.383,25.295 ; L2.2 27.735,26.124 31.846,26.124 31.877,26.155 R23.2
  Bottom Layer w0.432: v1(17.592,22.836) v1(19.492,22.836) ; v1(42.418,21.336) 42.418,13.589 42.926,13.081 61.341,13.081 65.151,16.891 v1(65.151,21.717)
24v: F1.1 KF1.1 Q1.2 R12.2 R16.1 | length 44.9
  Top Layer w0.203: R16.1 28.326,23.162 28.326,23.145 28.341,23.131 28.753,23.131 v1(28.829,23.055) ; R12.2 44.362,14.736 Q1.2
  Bottom Layer w0.203: v1(28.829,23.055) 28.888,23.114 44.425,23.114 46.101,24.79
  Bottom Layer w0.889: v1(46.101,16.51) 46.101,24.79 47.041,25.73 F1.1 52.578,28.448 53.467,29.337 KF1.1
  other v1: 44.196,14.605 44.196,14.605 44.196,14.605 44.196,14.605 44.196,14.605 44.196,14.605 44.196,14.605 44.196,14.605 44.196,14.605 44.831,14.605 44.831,14.605 44.831,14.605 44.831,14.605 44.831,14.605 44.831,14.605 44.831,14.605 44.831,14.605 44.831,14.605 45.466,14.605 45.466,14.605 45.466,14.605 45.466,14.605 45.466,14.605 45.466,14.605 46.101,14.605 46.101,14.605 46.101,14.605 46.736,14.605 46.736,14.605 46.736,14.605 46.736,14.605 46.736,14.605 46.736,14.605 47.371,14.605 47.371,14.605 47.371,14.605 47.371,14.605 47.371,14.605 47.371,14.605 47.371,14.605 47.371,14.605 47.371,14.605 48.006,14.605 48.006,14.605 48.006,14.605 48.006,14.605 48.006,14.605 48.006,14.605 48.006,14.605 48.006,14.605 48.006,14.605 48.006,14.605 48.006,14.605 48.006,14.605 48.641,14.605 48.641,14.605 48.641,14.605 48.641,14.605 48.641,14.605 48.641,14.605 48.641,14.605 48.641,14.605 48.641,14.605 44.196,15.24 44.831,15.24 45.466,15.24 46.101,15.24 46.101,15.24 46.736,15.24 47.371,15.24 48.006,15.24 48.641,15.24 44.196,15.875 44.831,15.875 45.466,15.875 46.101,15.875 46.101,15.875 46.736,15.875 47.371,15.875 48.006,15.875 48.641,15.875 44.196,16.51 44.831,16.51 45.466,16.51 46.101,16.51 46.736,16.51 47.371,16.51 48.006,16.51 48.641,16.51 44.196,17.145 44.831,17.145 45.466,17.145 46.101,17.145 46.101,17.145 46.736,17.145 47.371,17.145 48.006,17.145 48.641,17.145 44.196,17.78 44.831,17.78 45.466,17.78 46.101,17.78 46.101,17.78 46.736,17.78 47.371,17.78 48.006,17.78 48.641,17.78 44.196,18.415 44.831,18.415 45.466,18.415 46.101,18.415 46.101,18.415 46.736,18.415 47.371,18.415 48.006,18.415 48.641,18.415 44.196,19.05 44.831,19.05 45.466,19.05 46.101,19.05 46.736,19.05 47.371,19.05 48.006,19.05 48.641,19.05
A0: JP4.5 U4.45 | length 25.8
  Top Layer w0.203: v1(24.892,14.264) 24.92,14.264 25.039,14.383 U4.45
  Bottom Layer w0.432: JP4.5@1.778,16.764 22.392,16.764 v1(24.892,14.264)
A5: JP4.7 U4.15 | length 27.3
  Top Layer w0.203: U4.15 24.539,5.913 24.76,5.692 v1(24.76,5.585)
  Bottom Layer w0.432: JP4.7@1.778,11.684 10.033,11.684 15.711,6.006 22.476,6.006 22.897,5.585 v1(24.76,5.585)
A7: JP4.6 U4.17 | length 28.4
  Top Layer w0.203: v1(25.43,6.027) 25.494,6.091 25.494,7.274 U4.17
  Bottom Layer w0.432: JP4.6@1.778,14.224 8.89,14.224 16.473,6.641 24.771,6.641 25.385,6.027 v1(25.43,6.027)
adc_current: C3.1 R5.2 U4.18 | length 33.5
  Top Layer w0.203: v1(25.934,8.763) 25.994,8.703 25.994,7.364 U4.18 26.039,4.774 C3.1 ; v1(26.065,11.527) 26.065,11.587 29.118,14.64 29.429,14.64 31.426,16.637 v1(39.37,16.637)
  Top Layer w0.432: v1(42.037,22.352) 42.083,22.352 42.591,22.86 R5.2
  Bottom Layer w0.203: v1(25.934,8.763) 25.934,8.87 25.811,8.993 25.811,10.284 26.065,10.537 v1(26.065,11.527)
  Bottom Layer w0.432: v1(39.37,16.637) 40.386,16.637 41.529,17.78 41.529,21.798 42.037,22.306 v1(42.037,22.352)
adc_rung: C9.1 R17.2 U4.13 | length 31.3
  Top Layer w0.203: v1(23.114,4.714) 23.114,5.588 23.539,6.013 U4.13
  Top Layer w0.432: R17.2 R17.2@37.134,3.214 ; v1(38.244,4.047) 38.212,4.015 37.935,4.015 R17.2@37.134,3.214 ; v3(48.514,2.794) 37.554,2.794 R17.2@37.134,3.214
  Bottom Layer w0.203: v1(23.114,4.714) 23.891,3.937 32.833,3.937 32.943,4.047 v1(38.244,4.047)
adc_temp: C2.1 R4.2 U4.14 | length 49.4
  Top Layer w0.203: U4.14 24.039,5.206 24.531,4.714 v1(24.606,4.714)
  Top Layer w0.432: v1(30.861,7.62) 53.467,7.62 62.142,16.295 R4.2
  Bottom Layer w0.432: v1(24.606,4.714) 25.542,4.714 28.448,7.62 v1(30.861,7.62)
adc_voltage: C10.1 R16.2 R18.1 U4.19 | length 40.1
  Top Layer w0.203: R18.1 R16.2 26.293,22.34 26.412,22.221 35.564,22.221 35.789,21.996 v1(35.814,21.996) ; U4.19 26.539,5.691 27.516,4.714 C10.1 27.576,4.699 v1(27.559,4.699)
  Bottom Layer w0.203: v1(27.559,4.699) 27.666,4.699 28.017,4.348 32.669,4.348 34.557,6.236 34.557,13.094 36.038,14.575 36.038,17.866 35.814,18.09 v1(35.814,21.996)
AGND: C27.2 C28.2 NT1.2 U3.2 U4.8 | length 22.5
  Top Layer w0.203: v1(19.431,14.224) 19.431,11.972 20.596,10.807 U4.8
  Top Layer w0.432: v1(15.875,14.478) 15.167,14.478 14.914,14.731 C28.2 14.914,20.265 16.112,21.463 18.923,21.463 ; U3.2 18.542,21.844 18.923,21.463 ; NT1.2@19.812,21.463 18.923,21.463
  Bottom Layer w0.203: v1(15.875,14.478) 19.07,14.478 19.324,14.224 v1(19.431,14.224)
AVCC: C27.1 C28.1 U3.4 U3.5 U4.9 | length 16.2
  Top Layer w0.203: 18.222,14.478 18.984,13.716 18.984,11.844 20.521,10.307 U4.9
  Top Layer w0.432: U3.4 U3.5 19.492,17.896 C28.1 ; C27.1@17.641,14.478 18.222,14.478 18.536,14.793 18.536,16.94 C28.1 ; C28.1@17.768,16.172 C28.1
B6: JP4.3 U4.42 | length 30.1
  Top Layer w0.203: U4.42 26.539,14.664 26.954,14.249 v1(26.954,14.224)
  Bottom Layer w0.432: JP4.3@1.778,21.844 3.048,20.574 20.582,20.574 23.73,17.426 23.829,17.426 26.561,14.695 26.561,14.663 26.954,14.27 v1(26.954,14.224)
B7: JP4.4 U4.43 | length 27.6
  Top Layer w0.203: v1(25.841,14.397) 25.841,14.504 26.037,14.7 26.037,15.793 U4.43
  Bottom Layer w0.432: JP4.4@1.778,19.304 20.954,19.304 25.841,14.417 v1(25.841,14.397)
buzzer: R20.2 U4.29 | length 30.6
  Top Layer w0.203: v1(29.083,10.795) 29.095,10.807 U4.29
  Top Layer w0.432: R20.2 7.112,12.915 7.112,14.686 7.493,15.067 v1(7.493,15.113)
  Bottom Layer w0.203: v1(7.493,15.113) 9.271,15.113 16.764,7.62 27.051,7.62 29.083,9.652 v1(29.083,10.795)
CLK: JP1.2 U4.37 | length 11.1
  Top Layer w0.203: U4.37 29.039,16.495 29.591,17.047 35.97,17.047 37.211,18.288 JP1.2@37.211,19.812
enc_a: C7.2 R3.1 SW1.A U4.10 | length 68.4
  Top Layer w0.203: C7.2 18.161,5.764 19.842,7.445 19.842,8.733 20.896,9.787 22.031,9.787 U4.10 ; v1(19.06,2.286) 32.169,2.286 33.097,3.214 R3.1
  Top Layer w0.432: R3.1 33.369,2.992 33.369,2.572 v1(33.401,2.54)
  Bottom Layer w0.203: v1(18.161,4.699) 18.161,3.185 v1(19.06,2.286)
  Bottom Layer w0.432: v1(33.401,2.54) 39.751,2.54 44.577,7.366 63.881,7.366 65.619,5.628 SW1.A
enc_b: C6.2 R2.1 SW1.B U4.11 | length 65
  Top Layer w0.203: v1(19.685,4.714) 19.76,4.714 20.043,4.997 20.447,5.401 20.447,8.763 20.946,9.262 22.006,9.262 U4.11
  Bottom Layer w0.203: v1(19.685,4.714) 20.29,5.319 21.986,5.319 22.352,4.953 22.352,4.064 22.885,3.531 31.373,3.531 31.69,3.214 v1@35.052,3.214
  Bottom Layer w0.432: v1(35.052,3.259) 35.052,3.214 38.774,3.214 44.049,8.489 64.369,8.489 66.508,10.628 SW1.B
enc_c: C5.2 R1.1 SW1.1 U4.12 | length 45
  Top Layer w0.203: v1(21.463,4.714) 21.463,8.219 U4.12
  Bottom Layer w0.203: v1(21.463,4.714) 21.946,4.231 21.946,3.896 22.92,2.921 v1(31.115,2.921)
  Bottom Layer w0.432: v1(31.115,2.921) 32.258,1.778 41.021,1.778 44.871,5.628 SW1.1
GND: AMS1.1 BT1.1 C1.1 C2.2 C3.2 C4.1 C5.1 C6.1 C7.1 C9.2 C10.2 C11.1 C12.1 C13.1 C14.1 C15.1 C16.1 C18.2 C20.2 C21.2 C22.1 C23.1 C24.1 C25.2 C26.2 D2.1 IC1.4 JP1.3 JP2.2 JP4.2 KF1.2 L1.2 L3.2 LS1.2 NT1.1 Q2.2 R9.1 R15.2 R18.2 R22.1 R26.1 R27.1 R28.1 R29.1 SW1.2 SW1.C U1.5 U1.9 U2.3 U2.4 U2.5 U4.23 U4.35 U4.47 XT1.G | length 317.7
  Top Layer w0.203: L1.2 15.301,34.044 16.383,32.962 v1(16.383,31.962) ; C12.1 16.129,6.589 16.129,7.541 15.791,7.879 15.791,9.279 17.991,11.479 17.991,11.679 17.661,12.009 17.661,12.961 C11.1 ; 24.511,20.308 24.511,17.907 24.039,17.435 U4.47 24.039,10.886 24.668,10.257 28.28,10.257 28.494,10.043 ; 28.337,3.414 28.337,5.731 28.539,5.933 U4.23 28.494,7.364 28.494,10.043 ; v1(34.036,13.807) U4.35 29.21,13.807 28.478,13.075 28.478,10.059 28.494,10.043
  Top Layer w0.432: LS1.2 5.715,15.113 7.606,17.004 7.606,18.429 ; AMS1.1 7.606,18.429 ; C13.1 8.001,18.034 7.606,18.429 ; C12.1@16.241,6.35 16.241,3.825 16.652,3.414 C7.1 C6.1 C5.1 C9.2 C2.2 C3.2 C10.2 28.337,3.414 C23.1 ; C21.2@16.383,30.962 17.167,30.178 19.784,30.178 22.86,27.102 D2.1 ; v1(16.383,31.962) 16.892,32.471 16.892,34.418 17.145,34.671 21.845,34.671 22.098,34.418 L3.2 ; NT1.1 21.247,21.463 21.495,21.711 21.495,22.257 v1(21.527,22.289) ; v1@21.463,22.257 C14.1 22.391,22.972 22.864,23.445 R18.2 ; C16.1 22.452,20.308 24.511,20.308 25.427,20.308 R15.2 R22.1 ; v1(34.036,13.807) C24.1 ; v1(35.433,15.946) 35.479,15.946 35.574,15.851 40.791,15.851 42.291,14.351 v1@42.291,9.652 ; C20.2 47.379,25.423 49.869,25.423 U2.5 ; KF1.2 50.927,34.925 69.977,34.925 JP2.2 71.374,29.718 70.627,28.971 C4.1 70.627,25.605 v1(70.705,25.527) IC1.4 71.324,25.527 71.402,25.605 71.402,25.775 71.877,26.25 R9.1 ; v1(49.626,9.718) Q2.2 ; BT1.1 56.896,6.477 57.023,6.35 ; v3(57.023,2.794) 57.023,6.35 ; v1(68.199,25.908) 68.207,25.916 68.207,27.17 C1.1 ; SW1.C 61.667,8.128 SW1.2 57.023,8.484 57.023,6.35
  Top Layer w0.889: JP4.2@1.778,24.384 5.424,24.384 5.944,23.864 8.497,23.864 ; AMS1.1 7.606,22.973 8.497,23.864 ; v1(16.383,31.962) 14.69,31.962 14.224,31.496 C26.2 8.497,23.864 ; D2.1@22.86,27.102 23.266,27.507 23.666,27.507 24.795,28.637 v1(27.813,28.637) ; R26.1 31.738,31.846 31.846,31.738 31.846,30.753 R27.1 R28.1 39.36,30.722 40.259,31.621 v1(40.259,32.639) v1(40.259,32.671) 40.545,32.385 KF1.2 ; U2.5 U2.4
  Bottom Layer w0.432: v1(16.383,31.962) 17.738,30.607 17.738,26.078 19.676,24.14 v1(21.527,22.289) 32.194,22.289 JP1.3@34.671,19.812 ; v1(34.036,13.807) 35.401,15.172 35.401,15.914 v1(35.433,15.946) 34.671,16.708 JP1.3 ; v1(42.291,9.718) v1(49.626,9.718) 57.93,9.718 58.839,10.628 SW1.2 ; v1(68.199,25.908) 68.58,25.527 v1(70.705,25.527)
  Bottom Layer w0.889: v1(27.813,28.637) 29.718,28.637 29.718,27.674 ; U1.5 29.718,27.674 ; 33.002,27.618 33.523,27.098 33.523,26.383 33.679,26.227 C18.2 ; v1(40.259,32.639) 40.259,29.337 38.596,27.674 R29.1 29.718,27.674
  other v1: 26.543,28.002 27.178,28.002 27.813,28.002 27.813,28.002 28.448,28.002 29.083,28.002 26.543,28.637 26.543,28.637 27.178,28.637 27.178,28.637 27.813,28.637 27.813,28.637 27.813,28.637 27.813,28.637 28.448,28.637 28.448,28.637 29.083,28.637 29.083,28.637 26.543,29.272 27.178,29.272 27.813,29.272 27.813,29.272 28.448,29.272 29.083,29.272 40.259,31.401 40.894,31.401 40.259,32.036 40.894,32.036 40.259,32.671 40.894,32.671 40.894,32.671 40.259,33.306 40.894,33.306 40.259,33.941 40.894,33.941
  other v2: 14.605,1.651 70.53,2.923 8.255,3.048 2.54,3.937 70.993,13.208 67.52,17.668 13.384,25.171 36.81,27.744 6.35,28.956 42.291,30.099 73.976,30.274 38.1,31.242 16.383,31.962 13.335,33.909 35.179,33.909 43.815,34.163
HEAT+: D1.2 KF2.2 Q1.3 | length 22.3
  Top Layer w0.889: v1(53.086,18.796) 53.736,18.796 53.891,18.641 53.891,18.042 56.896,15.037 D1.2
  Bottom Layer w0.889: v1(53.086,18.796) 53.086,24.638 59.093,30.645 59.093,32.042 KF2.2
  other v1: 52.451,17.526 53.086,17.526 53.086,17.526 53.721,17.526 53.721,17.526 54.356,17.526 52.451,18.161 52.451,18.161 53.086,18.161 53.086,18.161 53.086,18.161 53.086,18.161 53.721,18.161 53.721,18.161 53.721,18.161 53.721,18.161 54.356,18.161 54.356,18.161 52.451,18.796 52.451,18.796 53.086,18.796 53.086,18.796 53.086,18.796 53.086,18.796 53.721,18.796 53.721,18.796 53.721,18.796 53.721,18.796 54.356,18.796 54.356,18.796 52.451,19.431 53.086,19.431 53.086,19.431 53.721,19.431 53.721,19.431 54.356,19.431
HEAT-: D1.1 KF2.1 U2.1 U2.2 | length 17.9
  Top Layer w0.889: D1.1 56.896,22.765 57.023,22.892 58.706,22.892 64.516,28.702 KF2.1
IO: JP1.4 U4.34 | length 12.9
  Top Layer w0.203: U4.34 31.651,13.307 32.004,12.954 34.368,12.954 35.052,13.638 35.052,15.318 34.4,15.971 v1(33.508,15.971)
  Bottom Layer w0.203: JP1.4@32.131,19.812 32.131,17.348 v1(33.508,15.971)
LED: AMS1.2 AMS1.4 C15.2 C16.2 C22.2 C23.2 C24.2 JP1.1 JP4.1 JP4.8 R1.2 R2.2 R3.2 R17.1 R21.2 U4.24 U4.36 U4.48 | length 116.4
  Top Layer w0.203: U4.48 23.539,18.698 C22.2 ; U4.24 29.039,4.758 C23.2 ; U4.36 31.743,14.307 C15.2@32.564,15.128 ; C15.2 C24.2 v1(34.036,15.113)
  Top Layer w0.432: JP4.8@1.778,9.144 2.002,9.368 3.018,9.368 3.556,9.906 v1(3.556,22.352) ; AMS1.2 v1(9.906,22.606) ; v1(9.906,25.908) AMS1.4@10.16,26.162 ; C22.2 C16.2 21.462,18.908 21.209,19.161 21.209,20.433 22.053,21.277 v1(23.241,21.277) 28.546,21.277 ; C23.2 29.158,4.714 29.358,4.914 R1.2 R3.2 R2.2 R17.1 ; R21.2 29.033,20.408 28.799,20.642 28.799,21.024 28.546,21.277 ; JP1.1 39.167,20.015 39.04,20.015 37.778,21.277 28.546,21.277
  Top Layer w0.889: JP4.1@1.778,26.924 8.18,26.924 8.334,26.77 9.044,26.77 v1(9.906,25.908)
  Bottom Layer w0.432: JP4.1@1.778,26.924 3.303,26.924 3.556,26.671 v1(3.556,22.352) ; v1(9.906,25.908) v1(9.906,22.606) 11.235,21.277 v1(23.241,21.277) 27.11,21.277 33.242,15.145 34.004,15.145 v1(34.036,15.113) 32.512,13.589 32.512,6.477 v1(30.988,4.953)
NetC11_2: C11.2 U4.5 XT1.1 | length 8.5
  Top Layer w0.203: XT1.1 16.129,12.017 16.129,13.096 C11.2@16.241,13.208 ; v1(20.574,12.487) 20.681,12.487 20.862,12.307 U4.5
  Bottom Layer w0.203: v1(15.748,11.43) 16.805,12.487 v1(20.574,12.487)
NetC12_2: C12.2 U4.6 XT1.3 | length 8.5
  Top Layer w0.203: C12.2@17.541,6.35 17.653,6.462 17.653,7.541 18.034,7.922 v1(18.034,9.779) ; v1(20.574,11.684) 20.794,11.684 20.917,11.807 U4.6
  Bottom Layer w0.203: v1(18.034,9.779) 19.939,11.684 v1(20.574,11.684)
NetC17_1: C17.1 D2.2 L2.1 U1.1 | length 7.2
  Top Layer w0.889: v1(22.86,30.607) 22.86,31.102 23.604,31.846 23.604,33.626 C17.1
  Bottom Layer w0.432: v1(22.86,30.607) 23.619,31.366 25.908,31.366 U1.1@26.162,31.366 ; U1.1 U1.1@26.035,31.239
  other v1: 26.035,31.75
NetC17_2: C17.2 U1.8 | length 7.8
  Top Layer w0.432: v1(25.109,30.211) 25.122,30.223 25.122,33.643 C17.2
  Bottom Layer w0.432: v1(25.109,30.211) 25.109,27.646 25.908,26.847 U1.8
NetC18_1: C18.1 C25.1 F1.2 R24.2 U1.7 | length 30.1
  Top Layer w0.889: R24.2 33.655,26.149 33.686,26.118 33.711,26.118 34.252,25.577 39.703,25.577 40.259,25.021 v1(40.259,24.384)
  Bottom Layer w0.889: U1.7 27.178,24.651 27.706,24.123 32.995,24.123 33.044,24.172 33.623,24.172 C18.1 40.202,24.327 v1(40.259,24.384) 43.701,27.826 45.479,27.826 45.847,28.194 F1.2
NetC19_1: C19.1 U1.3 | length 3.6
  Top Layer w0.432: C19.1 27.068,33.655 27.327,33.396 27.327,32.892 27.58,32.639 v1(28.448,32.639)
  Bottom Layer w0.432: U1.3 v1(28.448,32.639)
NetC19_2: C19.2 R26.2 | length 1.7
  Top Layer w0.889: C19.2 R26.2
NetC20_1: C20.1 U2.6 | length 2.5
  Top Layer w0.432: C20.1 47.394,24.138 49.854,24.138 U2.6
NetIC1_1: IC1.1 R4.1 R6.2 | length 9.9
  Top Layer w0.432: R4.1 68.9,20.447 70.17,21.717 IC1.1 72.318,21.717 72.426,21.609 72.791,21.609 R6.2
NetIC1_2: IC1.2 R6.1 R9.2 | length 3.8
  Top Layer w0.432: IC1.2 71.416,22.987 71.504,23.075 R6.1 R9.2
NetL1_1: L1.1 R19.2 | length 2.2
  Top Layer w0.203: L1.1 8.64,33.751 R19.2
NetL3_1: L3.1 R25.1 | length 6.6
  Top Layer w0.432: v1(19.812,33.401) L3.1 ; v1(20.435,27.178) R25.1
  Bottom Layer w0.432: v1(19.812,33.401) 20.435,32.778 v1(20.435,27.178)
NetLS1_1: LS1.1 Q3.2 | length 7.4
  Top Layer w0.432: Q3.2 12.288,10.054 13.335,9.007 LS1.1
NetQ1_1: Q1.1 Q2.3 R12.1 | length 8.1
  Top Layer w0.432: R12.1 48.437,11.938 48.646,12.147 Q2.3 50.511,12.299 52.436,14.224 Q1.1
NetQ2_1: Q2.1 R7.1 | length 1.9
  Top Layer w0.432: R7.1 47.492,10.16 47.701,9.951 Q2.1
NetQ3_1: Q3.1 R20.1 | length 1.6
  Top Layer w0.432: R20.1 8.737,12.84 10.351,12.84 Q3.1
NetR5_1: R5.1 U2.7 | length 2.8
  Top Layer w0.432: R5.1 47.094,22.876 49.861,22.876 U2.7
NetR15_1: R15.1 U4.44 | length 2.9
  Top Layer w0.203: R15.1 25.539,18.696 U4.44
NetR19_1: R19.1 U4.2 | length 36.8
  Top Layer w0.203: v1(4.953,15.875) v1(4.953,21.717) ; R19.1 10.414,31.938 v1(10.414,28.448) ; v1(20.066,15.113) 20.066,14.351 20.61,13.807 U4.2
  Bottom Layer w0.203: v1(4.953,15.875) 19.304,15.875 v1(20.066,15.113) ; v1(4.953,21.717) 4.953,21.81 10.414,27.271 v1(10.414,28.448)
NetR22_2: R22.2 U4.20 | length 12.3
  Top Layer w0.203: U4.20 27.039,9.124 27.162,9.246 v1(27.162,9.354)
  Bottom Layer w0.203: v1(27.162,9.354) 28.469,10.661 28.469,17.378 v1(27.305,18.542)
NetR23_1: R23.1 R27.2 U1.4 | length 4.9
  Top Layer w0.889: R23.1 v1(31.877,29.222)
  Bottom Layer w0.432: U1.4 29.718,30.472 29.802,30.388 30.711,30.388 v1(31.877,29.222)
NetR24_1: R24.1 R28.2 U1.2 | length 14.3
  Top Layer w0.432: v1(33.643,29.222) R28.2
  Top Layer w0.889: R24.1 R28.2
  Bottom Layer w0.432: U1.2 27.178,33.656 27.431,33.909 31.75,33.909 33.643,32.016 v1(33.643,29.222)
NetR29_2: R29.2 U1.6 | length 5.2
  Bottom Layer w0.203: U1.6 28.448,25.477 29.053,24.872 31.095,24.872 31.504,25.281 31.504,25.801 R29.2
PWM: R7.2 U4.30 U4.40 | length 15.3
  Top Layer w0.203: U4.30 32.254,11.307 34.544,9.017 43.219,9.017 43.97,9.768 44.014,9.768 44.362,10.116 R7.2
RESET: BT1.2 R21.1 U4.7 | length 42.2
  Top Layer w0.203: U4.7 22.053,11.305 23.366,11.305 v1(23.368,11.303) ; v1(26.543,17.78) 28.837,17.78 28.956,17.899 R21.1@28.956,18.327 ; v1(29.043,18.327) 29.083,18.367 R21.1 ; v1(30.48,6.35) 44.76,6.35 BT1.2
  Bottom Layer w0.203: v1(23.368,11.303) 24.985,11.303 27.083,13.4 27.656,13.973 27.656,16.667 v1(26.543,17.78) ; v1(29.043,18.327) 29.043,12.867 31.623,10.287 31.623,7.493 v1(30.48,6.35)
ther+: C4.2 IC1.3 JP2.1 | length 10.8
  Top Layer w0.432: JP2.1 68.834,32.004 69.037,31.801 69.037,29.134 69.327,28.844 C4.2 69.327,24.51 69.58,24.257 IC1.3
pads on no net: IC1.5 IC1.6 IC1.7 R1.0 R2.0 R3.0 R4.0 R5.0 R6.0 R7.0 R9.0 R12.0 R15.0 R16.0 R17.0 R18.0 R19.0 R20.0 R21.0 R22.0 SW1.S1 SW1.S2 U4.1 U4.3 U4.4 U4.16 U4.21 U4.22 U4.25 U4.26 U4.27 U4.28 U4.31 U4.32 U4.33 U4.38 U4.39 U4.41 U4.46

## Polygon pours and split planes (outlines as drawn)
GND on Bottom Layer "NONET_L-01_P-001" (solid, remove dead copper, pour order 10): 0.508,35.56 75.819,35.56 75.819,0.508 0.508,0.508
GND on Bottom Layer "NONET_L-01_P-001" (solid, shelved, pour order 6): -2.286,93.218 41.402,93.218 41.402,44.958 -2.286,44.958
GND on Top Layer "NONET_L-01_P-001" (solid, remove dead copper, pour order 8): 0.508,35.56 75.819,35.56 75.819,0.508 0.508,0.508
GND on Top Layer "NONET_L-01_P-001" (solid, shelved, pour order 7): -2.286,93.218 41.402,93.218 41.402,44.958 -2.286,44.958

## Keep-outs
Keep-Out Layer:
  lines w0.508: 0.254,0.508 ccw(c0.508,0.508) 0.508,0.254 ; 0.254,0.508 ccw(c0.508,0.508) 0.508,0.254 ; 0.254,0.508 0.254,35.56 ; 0.254,35.56 cw(c0.508,35.56) 0.508,35.814 ; 0.254,35.56 cw(c0.508,35.56) 0.508,35.814 ; 0.508,0.254 76.073,0.254 ; 0.508,35.814 75.819,35.814 ; 75.819,35.814 cw(c75.819,35.56) 76.073,35.56 ; 75.819,35.814 cw(c75.819,35.56) 76.073,35.56 ; 76.073,0.254 ccw(c76.073,0.508) 76.327,0.508 ; 76.073,0.254 ccw(c76.073,0.508) 76.327,0.508 ; 76.073,35.56 76.073,0.867 76.253,0.688 ; 76.253,0.688 cw(c76.073,0.508) 76.327,0.508 ; 76.253,0.688 cw(c76.073,0.508) 76.327,0.508 ; 0.762,0.762 75.565,0.762 75.565,35.306 0.762,35.306 0.762,0.762

## Other copper
Top Layer:
  region net HEAT-: 53.594,23.368 53.594,20.574 53.721,20.447 58.547,20.447 66.548,28.448 66.548,34.417 63.119,34.417 62.238,34.417 61.976,30.48 57.912,23.368
  region net GND: 57.15,23.876 53.213,23.876 52.07,25.019 46.863,25.019 45.72,26.162 45.72,34.163 45.847,34.29 50.165,34.29 50.927,33.528 50.927,27.432 51.181,27.178 57.15,27.178
  region net HEAT+: 51.816,16.891 51.816,19.939 54.991,19.939 54.991,16.891
Bottom Layer:
  region net GND: 29.464,28.575 37.592,28.575 38.989,29.972 38.989,34.544 39.243,34.798 41.402,34.798 41.402,29.337 39.243,27.178 29.464,27.178 29.083,27.559
  region net HEAT+: 51.816,24.003 57.023,29.21 57.023,33.274 58.166,34.417 61.595,34.417 62.103,33.909 62.103,24.257 54.737,16.891 51.816,16.891
  region net 24v: 43.307,22.987 51.689,31.369 51.689,34.036 52.07,34.417 55.626,34.417 56.134,33.909 56.007,33.782 56.007,29.083 51.181,24.257 51.181,13.589 43.307,13.589

## Silkscreen, mask and mechanical layers (free items; w line width, h text height)
Top Overlay:
  text "Sen+" at 68.453,31.877 h0.76 r270
  text "Sen-" at 71.12,31.877 h0.76 r270
  text "h-" at 65.405,28.575 h0.76
  text "h+" at 57.658,28.448 h0.76
  text "0+" at 46.355,27.94 h1.02
  text "24+" at 52.197,27.94 h1.02
  text "io 0 clk 3.3" at 31.877,16.764 h0.76
  text "LED A5 A7 A0 B7 B6 0 3v3" at 4.318,8.89 h0.76 r90
  text "mach tram han / da nang" at 32.766,6.731 h0.76
  text "rung" at 50.927,2.498 h1.02

## Text inside footprints (layer, text, board x,y; h text height)
LS1: Top Overlay "+" at 11.925,6.553 h1.52 r180
U2: Top Overlay "1" at 57.48,21.825 h0.51 r180; Top Overlay "8" at 48.514,21.927 h0.51 r180